# Altium PCB Overo Carrier.PcbDoc (part 2 of 2)
Units mil, origin at the board's own origin, x right, y up, seen from the top; angles counter-clockwise.
Board outline 2283.46 x 1417.32 mil, 2 copper layers (Top Layer, Bottom Layer), stack 22.091 mil thick; 56 components, 60 nets, 366 pads, 111 vias.
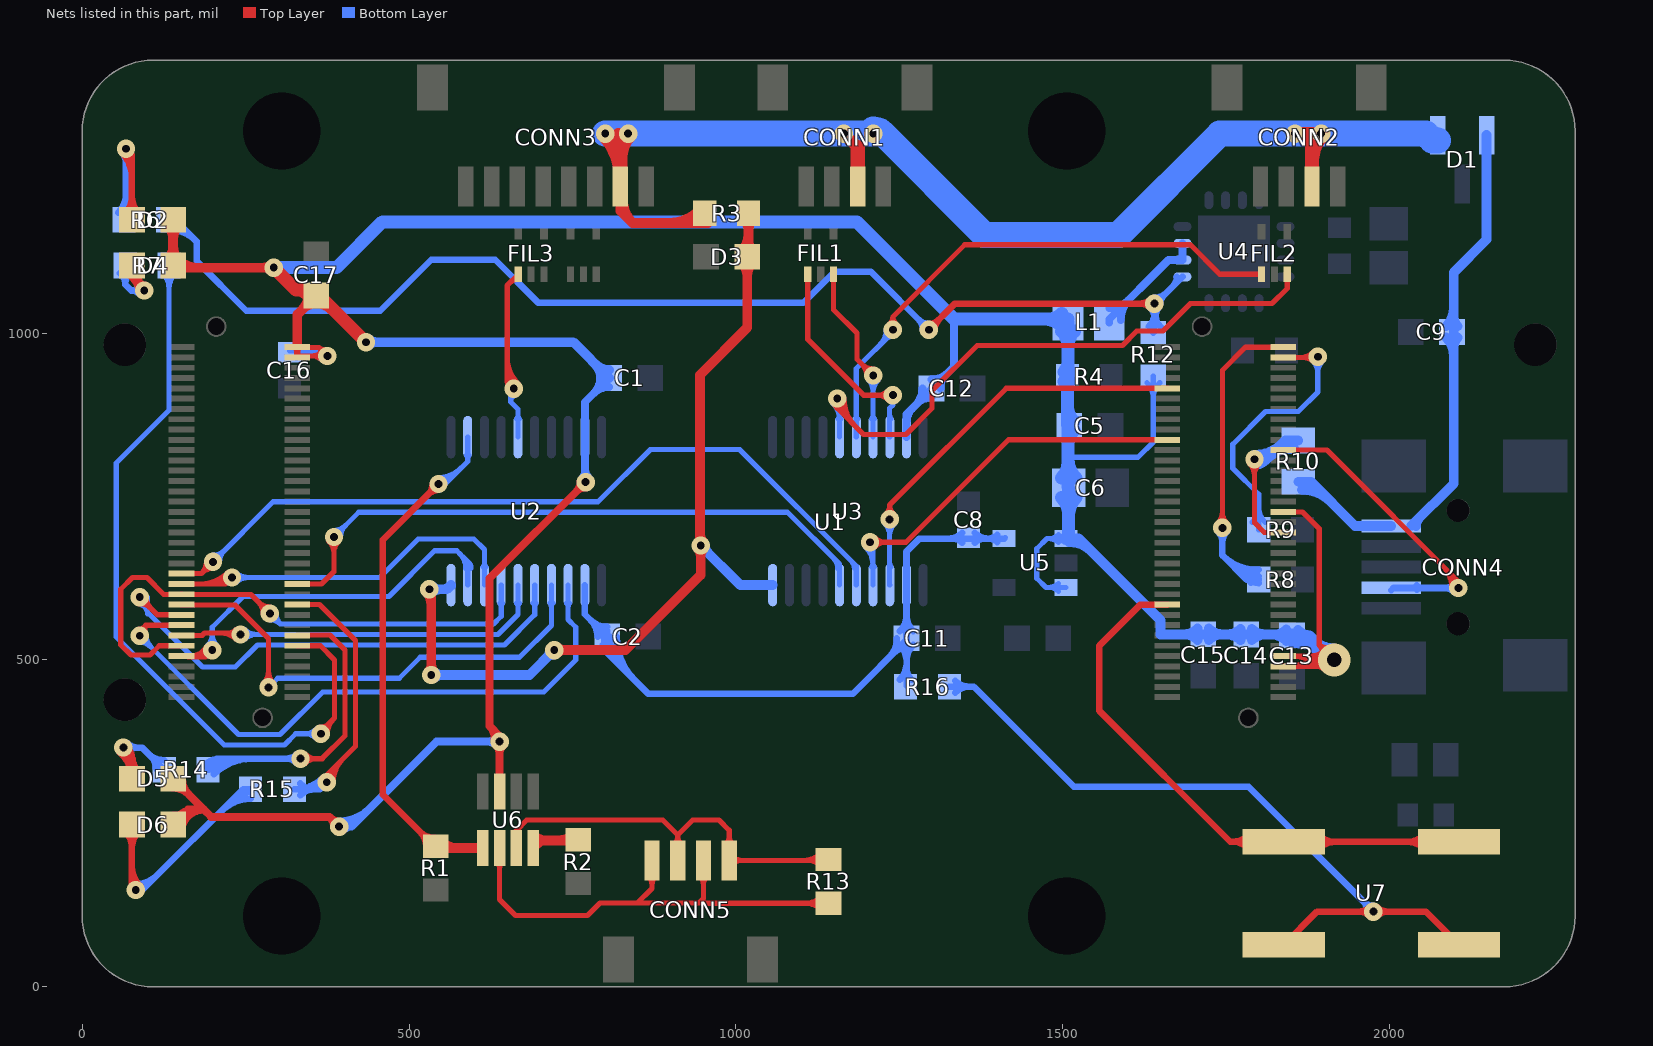
[diagram p2: the nets of this part, all layers, seen from the top]

## Via types
v1: diameter 28, hole 12, Top Layer to Bottom Layer, tented both sides, 109 vias
v2: diameter 28, hole 12, Top Layer to Bottom Layer, tented top, 1 vias
v3: diameter 50, hole 22, Top Layer to Bottom Layer, tented both sides, 1 vias

## Nets (pads, with @x,y where several pads share a name; then routed paths per layer and width w, separated by ;. In a path a pad name is that pad's centre, name@x,y a point inside that pad or via, vN(x,y) a via of type N, cw(c..) or ccw(c..) an arc to the next point about the centre after c; other vN are vias at no path point) (continued)
NetCONN4_4: CONN4.4 U1.J1-46 | length 575.7
  Top Layer w8: U1.J1-46@1836.92,820.93 1904.07,820.93 v1@2110,615 ; 2080.86,644.14 cw(c2046.72,610) v1@2095,610 ; 2094.51,630.49 cw(c2074.03,610) v1@2103,610
  Bottom Layer w10: CONN4.4@2002.26,606.5 2005.76,610 v1(2105,610) ; CONN4.4@2041.12,607.08 cw(c2048.17,600.03) 2048.17,610 ; CONN4.4@2041.12,613.93 ccw(c2050.6,623.41) 2050.6,610 ; v1@2098.64,603.64 ccw(c2083.27,588.27) 2083.27,610 ccw(c2083.27,631.73) v1@2098.64,616.36
NetCONN5_1: CONN5.1 CONN5.3 R13.1 U6.6 | length 872.6
  Top Layer w8: U6.6@635.04,189.96 cw(c626.74,181.66) 638.47,181.66 cw(c650.2,181.66) U6.6@641.91,189.96 ; U6.6@638.47,212.09 638.47,133.53 663,109 773,109 792,128 849,128 ; CONN5.1@866.02,169.15 cw(c852.69,155.81) 871.54,155.81 cw(c890.4,155.81) CONN5.1@877.07,169.15 ; CONN5.1@871.54,193.37 871.54,150.54 849,128 ; CONN5.3@944.76,169.15 cw(c931.43,155.81) 950.28,155.81 cw(c969.14,155.81) CONN5.3@955.81,169.15 ; CONN5.3@950.28,193.37 950.28,135.28 943,128 ; R13.1@1129.93,118.1 ccw(c1106.52,94.69) 1106.52,127.8 ccw(c1106.52,160.92) R13.1@1129.93,137.5 ; R13.1@1141.6,127.8 957.76,127.8 957.57,128 943,128 ; 849,128 943,128
NetCONN5_2: CONN5.2 CONN5.4 R13.2 U6.7 | length 762.7
  Top Layer w8: U6.7@664.06,212.09 664.06,239.06 680,255 888,255 910.91,232.09 ; CONN5.2@905.39,217.59 ccw(c892.06,230.93) 910.91,230.93 ccw(c929.77,230.93) CONN5.2@916.44,217.59 ; CONN5.2@910.91,193.37 910.91,232.09 ; CONN5.4@984.13,217.59 ccw(c970.8,230.93) 989.65,230.93 ccw(c1008.51,230.93) CONN5.4@995.18,217.59 ; CONN5.4@995.18,187.85 cw(c1008.51,174.51) 1008.51,193.37 cw(c1008.51,212.23) CONN5.4@995.18,198.89 ; 1103.23,193.37 ccw(c1103.23,231.14) R13.2@1129.93,204.43 ; 1109.8,193.37 cw(c1109.8,164.91) R13.2@1129.93,185.03 ; R13.2@1141.6,194.73 1140.24,193.37 CONN5.4@989.65,193.37 989.65,239.35 974,255 933.83,255 910.91,232.09
NetD2_1: D2.1 R6.2 | length 410.8
  Top Layer w10: v1@60.64,1275.64 cw(c23.29,1238.29) 76.1,1238.29 ; D2.1@65.72,1183.65 ccw(c40.65,1208.72) 76.1,1208.72 ccw(c111.56,1208.72) D2.1@86.49,1183.65 ; v1(67,1282) 76.1,1272.9 D2.1@76.1,1187 ; v1@67.71,1282.71 cw(c47.44,1262.44) 76.1,1262.44
  Bottom Layer w10: R6.2@54.95,1184.23 ccw(c25.84,1213.33) 67,1213.33 ; v1@60.64,1275.64 cw(c45.27,1260.27) 67,1260.27 cw(c88.73,1260.27) v1@73.36,1275.64 ; R6.2@63.94,1173.27 67,1176.33 v1(67,1282) ; 67,1198.54 ccw(c87.24,1198.54) R6.2@72.93,1184.23
NetD4_1: D4.1 R7.2 | length 319.4
  Top Layer w10: D4.1@66.42,1093.58 v1(95,1065) cw(c115,1085) D4.1@89.4,1097.03 ; D4.1@77.88,1087.29 ccw(c102.08,1101.26) v1@96.72,1073.83 ; D4.1@80.34,1101.28 ccw(c101.3,1091.44) 84.93,1075.07 ; 83.87,1076.91 ccw(c90.18,1080.56) v1@92.33,1073.6 ; v1@86,1065 ccw(c64.27,1065) 79.64,1080.36 ccw(c95,1095.73) v1@95,1074 ; v1@87.46,1069.92 ccw(c81.26,1073.97) 87.68,1077.68 ccw(c94.1,1081.39) v1@94.5,1073.99
  Bottom Layer w10: R7.2@57.77,1091.55 cw(c43.13,1074.06) 65.94,1074.06 ; R7.2@65.94,1103.27 65.94,1074.06 ; R7.2@74.1,1091.55 ccw(c88.74,1074.06) 65.94,1074.06 ; v1@88.26,1059.03 ccw(c75,1047.28) 75,1065 ; v1@88.26,1070.97 cw(c75,1082.72) 75,1065 ; v1(95,1065) 75,1065 ; 65.94,1074.06 75,1065
NetD5_1: D5.1 R14.1 | length 443.4
  Top Layer w10: v1@56.98,359.31 cw(c18.31,316.36) D5.1@76.1,316.36 ; v1@60.56,357.34 cw(c52.89,330.06) D5.1@80.26,337.39 ; v1(63,366) 76.1,352.9 ; v1@63.27,366.96 cw(c58.42,349.74) 75.71,354.37 ; v1@63.5,366.87 cw(c48.89,341.56) 77.11,349.12 ; v1@63.67,366.74 cw(c38.53,338.82) 76.1,338.82 ; v1@64.07,357.06 cw(c65.8,342.59) 76.1,352.9 ; D5.1@65.86,328.64 ccw(c42.27,352.89) 76.1,352.89 ; v1@71.94,364.93 ccw(c86.41,363.2) 76.1,352.9 ; D5.1@76.1,318.12 76.1,352.9 ; D5.1@86.34,328.64 cw(c109.94,352.89) 76.1,352.89
  Bottom Layer w10: v1(63,366) 91.54,366 R14.1@125.54,332 ; v1@69.36,359.64 cw(c84.73,344.27) 84.73,366 cw(c84.73,387.73) v1@69.36,372.36 ; 100.47,357.07 ccw(c125.54,382.14) R14.1@125.54,346.68 ; 105.22,352.32 cw(c86.87,333.97) R14.1@112.82,333.97
NetD6_1: D6.1 R15.1 | length 564
  Top Layer w10: D6.1@65.72,237.73 cw(c40.65,212.67) 76.1,212.67 cw(c111.56,212.67) D6.1@86.49,237.73 ; 76.1,183.96 ccw(c117.96,183.96) v1@88.36,154.36 ; D6.1@76.1,248.12 76.1,153.9 v1(82,148)
  Bottom Layer w10: v1@82,147 ccw(c82,168.73) 97.36,153.36 ; v1(82,148) 92,148 246,302 R15.1@257.54,302 ; v1@82,157 ccw(c82,202.87) 114.44,170.44 ; 212.77,268.77 cw(c257.54,224.01) R15.1@257.54,287.32 ; 229.85,285.85 cw(c257.54,258.16) R15.1@257.54,297.32
NetFIL1_1: FIL1.1 U3.18 | length 390.2
  Top Layer w8: FIL1.1@1109.91,1089.79 1109.91,990.09 1195,905 v1(1240,905) ; v1@1232.93,897.93 ccw(c1215.86,880.86) 1215.86,905 ccw(c1215.86,929.14) v1@1232.93,912.07
  Bottom Layer w8: 1235,873.94 ccw(c1242.81,873.94) U3.18@1237.29,868.42 ; U3.18@1235.24,840.79 1235,841.03 1235,885 1240,890 ; v1@1236.15,895.77 cw(c1233.75,890) 1240,890 ; v1(1240,905) 1240,890 ; v1@1243.85,895.77 ccw(c1246.25,890) 1240,890
NetFIL1_3: FIL1.3 U3.17 | length 361.1
  Top Layer w8: FIL1.3@1149.28,1089.79 1149.28,1035.72 1185,1000 1185,960 v1(1210,935) ; v1@1200,935 ccw(c1175.86,935) 1192.93,952.07 ccw(c1210,969.14) v1@1210,945
  Bottom Layer w8: v1@1202.93,927.93 cw(c1186.7,911.7) 1209.65,911.7 ; U3.17@1207.61,868.42 ccw(c1202.68,873.36) 1209.65,873.36 ccw(c1216.63,873.36) U3.17@1211.7,868.42 ; U3.17@1209.65,840.79 1209.65,934.65 v1(1210,935) ; 1209.65,910.02 cw(c1234.98,910.02) v1@1217.07,927.93
NetFIL2_1: FIL2.1 U3.16 | length 907
  Top Layer w8: v1@1234,1013 ccw(c1225,1025) 1240,1025 ; v1(1240,1005) 1240,1025 ; v1@1246,1013 cw(c1255,1025) 1240,1025 ; FIL2.1@1803.91,1089.79 1740.21,1089.79 1695,1135 1350,1135 1240,1025
  Bottom Layer w8: 1184,873.51 ccw(c1191.19,873.51) U3.16@1186.11,868.42 ; U3.16@1184.06,840.79 1184,840.85 1184,945.83 1240,1001.83 v1(1240,1005) ; 1220.69,982.52 ccw(c1198.21,1005) v1@1230,1005 ; 1228.34,990.17 cw(c1240,978.51) v1@1240,995
NetFIL2_3: FIL2.3 U3.15 | length 1070.6
  Top Layer w8: v1@1149,900 ccw(c1170.73,900) 1155.36,884.64 ; v1@1151.15,890.77 cw(c1148.75,885) 1155,885 ; v1(1155,900) 1155,885 ; v1@1157,900 ccw(c1198.04,900) 1169.02,870.98 ; v1@1158.85,890.77 ccw(c1161.25,885) 1155,885 ; v1@1165,900 ccw(c1225.36,900) 1182.68,857.32 ; FIL2.3@1843.28,1089.79 1843.28,1068.28 1820,1045 1695,1045 1653,1003 1613,1003 1591,981 1369,981 1300,912 1300,885 1260,845 1195,845 1155,885
  Bottom Layer w8: v1@1147.93,892.93 cw(c1122.48,867.48) U3.15@1158.47,867.48 ; v1(1155,900) 1158.47,896.53 U3.15@1158.47,840.79 ; U3.15@1156.43,868.42 ccw(c1151.5,873.36) 1158.47,873.36 ccw(c1165.45,873.36) U3.15@1160.52,868.42 ; 1158.47,884.24 cw(c1170.76,884.24) v1@1162.07,892.93
NetL1_1: L1.1 U4.14 U4.15 | length 246.7
  Bottom Layer w12: L1.1@1570.9,1016.27 1570.9,1020.9 1661.61,1111.61 U4.14@1682.99,1111.61 U4.15@1682.99,1137.2 ; L1.1@1570.9,1037.83 ccw(c1570.9,1078.7) 1599.8,1049.8 ; L1.1@1588.52,1020.2 cw(c1632.74,1020.2) 1601.47,1051.47
NetR1_2: R1.2 U2.12 U6.5 | length 988.7
  Top Layer w10: R1.2@526.05,215.06 ccw(c495.35,215.06) 517.06,236.77 ccw(c538.76,258.48) R1.2@538.76,227.78 ; v1@536,769 cw(c514.27,769) 529.64,753.64 cw(c545,738.27) v1@545,760 ; R1.2@540.73,213.09 460,293.83 460,684 v1(545,769)
  Top Layer w15: R1.2@540.73,213.09 541.73,212.09 U6.5@612.88,212.09 ; R1.2@549.93,207.84 cw(c560.2,197.56) R1.2@560.2,212.09 ; R1.2@549.93,222.29 ccw(c574.53,246.89) 574.53,212.09
  Bottom Layer w8: v1@545,771 ccw(c545,799.97) 565.49,779.49 ; v1@545,779 ccw(c545,827.28) 579.14,793.14 ; v1@546,760 589.7,803.7 U2.12@589.7,840.79 ; U2.12@587.66,813.16 cw(c582.72,808.22) 589.7,808.22 cw(c596.68,808.22) U2.12@591.74,813.16
NetR2_2: R2.2 U6.8 | length 136.3
  Top Layer w15: U6.8@689.65,212.09 701.56,224 ; U6.8@690.61,231.76 ccw(c709.34,250.48) 709.34,224 ; U6.8@690.92,231.29 ccw(c701.56,235.41) 701.56,224 ; 729.53,224 ccw(c729.53,252.29) R2.2@749.54,232.29 ; 734.66,224 cw(c734.66,202.96) R2.2@749.54,217.84 ; R2.2@747.83,224 701.56,224
NetR6_1: R6.1 R12.2 U4.13 | length 2147
  Top Layer w10: v1(1295,1005) 1335,1045 v1(1640,1045) ; v1@1295,1014 ccw(c1295,1035.73) 1310.36,1020.36 ccw(c1325.73,1005) v1@1304,1005 ; v1@1633.64,1038.64 ccw(c1618.27,1023.27) 1618.27,1045 ccw(c1618.27,1066.73) v1@1633.64,1051.36
  Bottom Layer w8: v1(1640,1045) v1@1641.98,1045
  Bottom Layer w10: R6.1@130.87,1158.58 cw(c130.87,1096.9) 174.49,1140.51 ; R6.1@130.87,1168.58 cw(c130.87,1131.04) 157.41,1157.59 ; R6.1@145,1170 175,1140 175,1110 251,1034 455.82,1034 533.82,1112 631.87,1112 697.87,1046 1103,1046 1151,1094 1206,1094 v1(1295,1005) ; v1@1286,1005 ccw(c1264.27,1005) 1279.64,1020.36 ccw(c1295,1035.73) v1@1295,1014 ; R12.2@1631.38,1009.72 ccw(c1610.56,1030.54) 1640,1030.54 ; v1@1633.64,1038.64 cw(c1618.27,1023.27) 1640,1023.27 cw(c1661.73,1023.27) v1@1646.36,1038.64 ; v1@1635.5,1037.21 cw(c1630.24,1028.09) 1640.41,1030.81 ; R12.2@1638.4,1000.73 1640,1002.33 v1(1640,1045) ; v1@1640,1032.33 ccw(c1671.96,1032.33) R12.2@1649.36,1009.72 ; v1@1640,1054 ccw(c1640,1080.5) 1658.74,1061.76 ; v1@1641.98,1045 U4.13@1682.99,1086.02 ; 1642.81,1021.83 cw(c1661.05,1026.72) v1@1646.79,1039.1 ; v1@1649,1045 cw(c1665.96,1045) 1653.97,1056.99 ; 1668,1071.03 ccw(c1653.02,1086.02) U4.13@1674.21,1086.02
NetR7_1: R7.1 U1.J4-30 | length 1305.9
  Top Layer w8: U1.J4-30@329.05,521.72 364.28,521.72 386,500 386,411 365,390 v1(365,387) ; v1@365,397 ccw(c365,413.9) 376.95,401.95 ; v1@375,387 cw(c406.38,387) 384.19,409.19
  Bottom Layer w8: R7.1@123.17,1091.6 cw(c99.75,1068.18) 132.87,1068.18 cw(c165.98,1068.18) R7.1@142.57,1091.6 ; R7.1@132.87,1103.27 132.87,881.87 52,801 52,535 217.27,369.73 309.36,369.73 326.63,387 v1(365,387) ; v1@357.93,379.93 ccw(c340.86,362.86) 340.86,387 ccw(c340.86,411.14) v1@357.93,394.07
NetR8_2: R8.2 U1.J1-36 | length 679.8
  Top Layer w8: v1@1736.93,709.07 ccw(c1719.86,726.14) 1744,726.14 ccw(c1768.14,726.14) v1@1751.07,709.07 ; v1(1744,702) 1744,943 1779.41,978.41 U1.J1-36@1836.92,978.41
  Bottom Layer w10: v1@1737.64,695.64 cw(c1722.27,680.27) 1744,680.27 cw(c1765.73,680.27) v1@1750.36,695.64 ; v1(1744,702) 1744,660 ; 1760.64,643.36 ccw(c1798.5,681.22) R8.2@1799.49,627.68 ; 1777.28,626.72 ccw(c1799.1,648.55) R8.2@1799.67,617.69 ; R8.2@1787.67,618.42 ccw(c1781,615.85) 1781,623 ; R8.2@1787.67,627.58 cw(c1781,630.15) 1781,623 ; R8.2@1799.3,637.68 cw(c1797.91,713.9) 1744,660 ; R8.2@1799.54,623 1781,623 ; 1744,660 1781,623
NetR9_2: R9.2 U1.J1-37 | length 545.8
  Top Layer w8: U1.J1-37@1836.92,962.41 1888.66,962.41 v1(1890,963.75) ; 1862.63,962.41 ccw(c1862.63,991.12) v1@1882.93,970.82 ; 1869.09,962.41 cw(c1869.09,942.84) v1@1882.93,956.68
  Bottom Layer w8: R9.2@1789.84,710.67 ccw(c1766.42,734.08) 1799.54,734.08 ccw(c1832.65,734.08) R9.2@1809.23,710.67 ; R9.2@1799.54,699 1799.54,753.46 1760,793 1760,830 1810,880 1860,880 1890,910 v1(1890,963.75) ; v1@1882.93,956.68 cw(c1865.86,939.61) 1890,939.61 cw(c1914.14,939.61) v1@1897.07,956.68
NetR10_2: R10.2 U1.J1-54 | length 401.8
  Top Layer w8: v1@1785.93,799.93 cw(c1768.86,782.86) 1793,782.86 cw(c1817.14,782.86) v1@1800.07,799.93 ; v1(1793,807) 1793,710 1808.06,694.94 U1.J1-54@1836.92,694.94
  Bottom Layer w15: v1@1793,798.5 ccw(c1793,823.03) 1810.35,805.69 ; v1(1793,807) 1811.66,807 ; v1@1793,813.5 ccw(c1793,874.25) R10.2@1835.95,831.29 ; v1@1797.6,802.4 cw(c1808.69,791.31) 1808.69,807 cw(c1808.69,822.69) v1@1797.6,811.6 ; R10.2@1853.57,823.32 ccw(c1851.19,767.48) 1811.66,807 ; R10.2@1860,835.5 1840.16,835.5 1811.66,807
NetR14_2: R14.2 U1.J4-29 | length 653
  Top Layer w8: U1.J4-29@329.05,538 379,538 402,515 402,384 367,349 v1(334,349) ; v1@341.07,341.93 cw(c358.14,324.86) 358.14,349 cw(c358.14,373.14) v1@341.07,356.07
  Bottom Layer w10: R14.2@187.31,339.12 cw(c211.17,315.26) 211.17,349 ; R14.2@192.46,332 209.46,349 v1(334,349) ; R14.2@194.39,332.05 cw(c235.31,291.12) 235.31,349 ; R14.2@201.46,324.98 cw(c259.45,266.98) 259.45,349 ; v1@327.64,342.64 ccw(c312.27,327.27) 312.27,349 ccw(c312.27,370.73) v1@327.64,355.36
NetR15_2: R15.2 U1.J4-26 | length 587.6
  Top Layer w8: U1.J4-26@329.05,584.71 362.92,584.71 418,529.63 418,368 374,324 v1(374,313) ; v1@376,313 cw(c407.38,313) 385.19,335.19 ; v1@384,313 cw(c434.7,313) 398.85,348.85
  Bottom Layer w10: R15.2@324.46,302 363,302 v1(374,313) ; R15.2@325.72,302 ccw(c325.72,361.28) v1@367.64,319.36 ; R15.2@333.46,293.01 cw(c355.16,271.3) 355.16,302 cw(c355.16,332.7) R15.2@333.46,310.99 ; 349.86,302 ccw(c349.86,337.14) v1@374.71,312.29
NetR16_2: R16.2 U7.A | length 1251.4
  Top Layer w10: U7.A@1838.14,64.26 1888.88,115 v1(1975,115) 2055.12,115 U7.A@2105.86,64.26 ; v1@1968.64,108.64 ccw(c1953.27,93.27) 1953.27,115 ccw(c1953.27,136.73) v1@1968.64,121.36 ; v1@1981.36,108.64 cw(c1996.73,93.27) 1996.73,115 cw(c1996.73,136.73) v1@1981.36,121.36
  Bottom Layer w10: R16.2@1326.46,459 1364,459 1517,306 1784,306 v1(1975,115) ; R16.2@1335.46,450.01 cw(c1357.16,428.3) 1357.16,459 cw(c1357.16,489.7) R16.2@1335.46,467.99 ; v1@1966,115 ccw(c1944.27,115) 1959.64,130.36 ccw(c1975,145.73) v1@1975,124
NetU1_J1-10: U1.J1-10 U7.B | length 1012.3
  Top Layer w10: U1.J1-10@1659.76,584.71 1618.71,584.71 1556,522 1556,422 1756,222 1804,222 U7.B@1816,234 ; 1758.75,222 cw(c1758.75,185.66) U7.B@1784.45,211.36 ; 1760.01,222 ccw(c1760.01,256.57) U7.B@1784.45,232.12 ; U7.B@1838.14,221.74 U7.B@2105.86,221.74 ; U7.B@1891.83,211.36 cw(c1916.9,186.29) 1916.9,221.74 cw(c1916.9,257.19) U7.B@1891.83,232.12 ; U7.B@2052.17,211.36 ccw(c2027.1,186.29) 2027.1,221.74 ccw(c2027.1,257.19) U7.B@2052.17,232.12
NetU1_J1-26: U1.J1-26 U3.4 | length 683.8
  Top Layer w8: v1(1205,680) 1260,680 1416.68,836.68 U1.J1-26@1659.76,836.68 ; v1@1212.07,672.93 cw(c1229.14,655.86) 1229.14,680 cw(c1229.14,704.14) v1@1212.07,687.07
  Bottom Layer w8: v1@1197.93,672.93 cw(c1169.62,644.62) U3.4@1209.65,644.62 ; v1@1203.59,678.59 cw(c1188.94,663.94) 1209.65,663.94 ; v1(1205,680) 1209.65,675.35 U3.4@1209.65,614.41 ; U3.4@1207.61,642.04 ccw(c1202.68,646.98) 1209.65,646.98 ccw(c1216.63,646.98) U3.4@1211.7,642.04
NetU1_J1-31: U1.J1-31 U3.3 | length 698.2
  Top Layer w8: v1@1228.42,722.53 ccw(c1215.8,737) 1235,737 ; v1(1235,715) 1235,737 ; v1@1241.58,722.53 cw(c1254.2,737) 1235,737 ; U1.J1-31@1659.76,915.42 1413.42,915.42 1235,737
  Bottom Layer w8: v1@1227.93,707.93 cw(c1210.86,690.86) 1235,690.86 cw(c1259.14,690.86) v1@1242.07,707.93 ; 1235,647.57 ccw(c1242.81,647.57) U3.3@1237.29,642.04 ; v1(1235,715) 1235,614.65 U3.3@1235.24,614.41
NetU1_J4-24: U1.J4-24 U3.6 | length 1064.7
  Top Layer w8: U1.J4-24@329.05,616.2 366.2,616.2 385,635 v1(385,688) ; v1@377.93,680.93 cw(c360.86,663.86) 385,663.86 cw(c409.14,663.86) v1@392.07,680.93
  Bottom Layer w8: v1(385,688) 423,726 1079,726 1158.47,646.53 U3.6@1158.47,614.41 ; v1@385,698 ccw(c385,722.14) 402.07,705.07 ccw(c419.14,688) v1@395,688 ; 1148.92,656.08 cw(c1132.85,640) U3.6@1155.58,640
NetU1_J4-40: U1.J4-40 U2.9 | length 713.8
  Top Layer w8: 176.62,504.75 ccw(c176.62,529.32) v1@197.32,516.08 ; v1@189.88,510.9 cw(c184.85,508.64) 188.75,504.75 ; v1@190.58,520.39 cw(c162,538.67) 162,504.75 188.75,504.75 ; v1@194.9,505.88 ccw(c192.64,500.85) 188.75,504.75 ; v1(199,515) 188.75,504.75
  Bottom Layer w8: v1@191.93,522.07 ccw(c174.86,539.14) 199,539.14 ccw(c223.14,539.14) v1@206.07,522.07 ; v1(199,515) 199,550 246.05,597.05 469.05,597.05 539,667 573,667 589.7,650.3 U2.9@589.7,614.41 ; 577.49,662.51 cw(c554.97,640) U2.9@586.81,640 ; U2.9@587.66,642.04 ccw(c582.72,646.98) 589.7,646.98 ccw(c596.68,646.98) U2.9@591.74,642.04 ; 591.14,648.86 cw(c582.29,640) U2.9@594.81,640
NetU1_J4-41: U1.J4-41 U1.J4-46 U2.7 | length 945.1
  Top Layer w8: U1.J4-41@151.88,521.72 117.72,521.72 103.5,507.5 74.5,507.5 59,523 59,608 77,626 99,626 124.8,600.2 U1.J4-46@151.88,600.2 ; U1.J4-46@151.88,600.46 151.88,599.95 258.1,599.95 v1(287,571.05) ; v1@277,571.05 ccw(c252.86,571.05) 269.93,588.12 ccw(c287,605.19) v1@287,581.05
  Bottom Layer w8: v1(287,571.05) 303.05,555 ; v1@287.45,561.06 cw(c288.37,540.33) 303.05,555 ; v1@296.99,570.6 ccw(c317.72,569.67) 303.05,555 ; U2.7@638.84,586.78 cw(c633.91,581.84) 640.88,581.84 cw(c647.86,581.84) U2.7@642.92,586.78 ; U2.7@640.88,614.41 640.88,566.88 629,555 303.05,555
NetU1_J4-47: U1.J4-47 U2.8 | length 668.1
  Top Layer w8: U1.J4-47@168,616.2 219.2,616.2 v1(229,626) v1@224,621 ; 181.21,616.2 ccw(c181.21,673.79) v1@221.93,633.07 ; 200.52,616.2 ccw(c200.52,654.48) v1@227.59,627.41
  Bottom Layer w8: v1(229,626) 455,626 514,685 599,685 615.29,668.71 U2.8@615.29,614.41 ; v1@236.07,618.93 cw(c253.14,601.86) 253.14,626 cw(c253.14,650.14) v1@236.07,633.07 ; U2.8@613.25,642.04 ccw(c608.31,646.98) 615.29,646.98 ccw(c622.27,646.98) U2.8@617.33,642.04
NetU1_J4-48: U1.J4-48 U3.5 | length 1283.2
  Top Layer w8: U1.J4-48@170.6,632.27 182.27,632.27 v1(200,650) ; v1@190,650 cw(c165.86,650) 182.93,632.93 cw(c200,615.86) v1@200,640
  Bottom Layer w8: v1(200,650) 292,742 789,742 869,822 1005.63,822 1184.06,643.56 U3.5@1184.06,614.41 ; v1@200,660 ccw(c200,684.14) 217.07,667.07 ccw(c234.14,650) v1@210,650 ; 1176.61,651.02 cw(c1165.59,640) U3.5@1181.17,640
NSS: FIL3.1 U2.15 | length 396.1
  Top Layer w8: 650,943.97 ccw(c688.97,943.97) v1@661.41,916.41 ; 650,963.28 ccw(c708.28,963.28) v1@667.07,922.07 ; v1@650.98,919.31 ccw(c646.47,921.46) 650,925 ; 653.58,1076.45 cw(c666.91,1063.12) FIL3.1@666.91,1081.98 ; v1@655.69,924.02 cw(c653.54,928.53) 650,925 ; v1(660,915) 650,925 ; FIL3.1@666.91,1089.79 650,1072.87 650,925
  Bottom Layer w8: 655,894.39 cw(c666.67,894.39) v1@663.08,905.48 ; v1(660,915) 655,910 655,895 666.47,883.53 U2.15@666.47,840.79 ; U2.15@664.43,868.42 ccw(c659.5,873.36) 666.47,873.36 ccw(c673.45,873.36) U2.15@668.52,868.42
OE: D3.1 R3.2 U2.10 U3.10 | length 1716.5
  Top Layer w15: v1@526.4,603.4 cw(c508.07,585.07) 534,585.07 ; v1@529.4,481.6 ccw(c518.31,492.69) 534,492.69 ccw(c549.69,492.69) v1@538.6,481.6 ; v1(531,608) 534,605 v1(534,477) ; v1(722,515) 831,515 946,630 v1(946,675) 945,676 945,936 1017.09,1008.09 D3.1@1017.09,1116.73 ; v1@726.6,510.4 cw(c737.69,499.31) 737.69,515 cw(c737.69,530.69) v1@726.6,519.6 ; v1@941.4,670.4 cw(c930.31,659.31) 946,659.31 cw(c961.69,659.31) v1@950.6,670.4 ; 945,693.11 ccw(c964.11,693.11) v1@950.6,679.6 ; D3.1@1008.48,1108.12 cw(c987.68,1087.32) 1017.09,1087.32 cw(c1046.51,1087.32) D3.1@1025.71,1108.12 ; D3.1@1008.48,1125.35 ccw(c982.92,1150.9) 1019.06,1150.9 ; R3.2@1011.84,1174.07 cw(c994.4,1156.63) 1019.06,1156.63 cw(c1043.73,1156.63) R3.2@1026.29,1174.07 ; D3.1@1019.06,1116.73 R3.2@1019.06,1182.47 ; 1019.06,1141.4 ccw(c1041.76,1141.4) D3.1@1025.71,1125.35
  Bottom Layer w15: v1(531,608) 557.7,608 U2.10@564.11,614.41 ; v1(534,477) 684,477 v1(722,515) ; v1@535.6,603.4 cw(c546.69,592.31) 546.69,608 cw(c546.69,623.69) v1@535.6,612.6 ; v1@538.6,472.4 cw(c549.69,461.31) 549.69,477 cw(c549.69,492.69) v1@538.6,481.6 ; 550.11,608 ccw(c550.11,628.42) U2.10@564.54,613.98 ; v1@715.5,515 cw(c699.81,515) 710.9,503.9 cw(c722,492.81) v1@722,508.5 ; v1@946,668.5 cw(c946,652.81) 957.1,663.9 cw(c968.19,675) v1@952.5,675 ; v1(946,675) 1006.59,614.41 U3.10@1056.11,614.41
SPI_CLK_OVERO: U1.J4-43 U2.3 | length 1042
  Top Layer w8: v1@87.43,546.98 ccw(c86.75,558.79) 97.04,552.96 ; v1(88,537) 97.04,552.96 ; v1@96.86,541.64 cw(c107.33,547.13) 97.04,552.96 ; U1.J4-43@151.88,553.21 151.63,552.96 97.04,552.96
  Bottom Layer w8: v1@88,527 cw(c88,502.86) 105.07,519.93 cw(c122.14,537) v1@98,537 ; v1(88,537) 239.27,385.73 302.73,385.73 368,451 706,451 755,500 755,550 743.24,561.76 U2.3@743.24,614.41 ; U2.3@741.2,586.78 cw(c736.27,581.84) 743.24,581.84 cw(c750.22,581.84) U2.3@745.29,586.78
SPI_MISO_OVERO: U1.J4-45 U2.4 | length 811.6
  Top Layer w8: U1.J4-45@151.88,583.95 233.91,583.95 285,532.87 v1(285,458) ; v1@277.93,465.07 ccw(c260.86,482.14) 285,482.14 ccw(c309.14,482.14) v1@292.07,465.07
  Bottom Layer w8: v1(285,458) 299,472 485,472 517,504 669,504 717.65,552.65 U2.4@717.65,614.41 ; U2.4@715.61,586.78 cw(c710.68,581.84) 717.65,581.84 cw(c724.63,581.84) U2.4@719.7,586.78
SPI_MOSI_OVERO: U1.J4-44 U2.5 | length 884.1
  Top Layer w8: v1@88,586 cw(c88,561.86) 105.07,578.93 cw(c122.14,596) v1@98,596 ; v1(88,596) 115.04,568.96 U1.J4-44@140,568.96
  Bottom Layer w8: v1@86.37,586.13 cw(c83.71,570.06) 100,570.06 ; v1@87.67,594.03 cw(c85.27,579.49) 100,579.49 ; v1@100,596 100,573 184,489 234,489 268,523 646,523 692.06,569.06 U2.5@692.06,614.41 ; U2.5@690.02,586.78 cw(c685.09,581.84) 692.06,581.84 cw(c699.04,581.84) U2.5@694.11,586.78
SPI_NSS: U1.J4-42 U2.6 | length 646.1
  Top Layer w8: U1.J4-42@167,537.46 183.46,537.46 187,541 240,541 v1(242,539) ; 213.03,541 cw(c213.03,510.03) v1@234.93,531.93 ; 222.69,541 ccw(c222.69,558.31) v1@234.93,546.07
  Bottom Layer w8: v1(242,539) 636,539 666.47,569.47 U2.6@666.47,614.41 ; v1@249.07,531.93 cw(c266.14,514.86) 266.14,539 cw(c266.14,563.14) v1@249.07,546.07 ; U2.6@664.43,586.78 cw(c659.5,581.84) 666.47,581.84 cw(c673.45,581.84) U2.6@668.52,586.78
V1.8: C2.2 C8.2 C11.2 R16.1 U2.2 U3.2 U5.5 | length 1590.4
  Bottom Layer w8: C11.2@1260.83,533.27 1260.83,530.34 1260.91,530.27 C11.2@1260.91,533.27 ; U5.5@1410.16,685.67 U5.5@1411.73,687.24
  Bottom Layer w10: U2.2@768.83,614.41 768.83,569.8 C2.2@802.91,535.73 ; C2.2@788.22,535.73 ccw(c752.77,535.73) 777.84,560.8 ccw(c802.91,585.87) C2.2@802.91,550.42 ; C2.2@795.92,522.82 cw(c789.58,511.1) 802.91,511.1 ; C2.2@797.59,535.73 ccw(c844.24,535.73) 811.25,502.75 ; C2.2@802.91,544.73 C2.2@802.91,535.73 ; C2.2@807.59,535.73 ccw(c878.38,535.73) 828.33,485.67 ; C2.2@809.89,522.82 ccw(c816.23,511.1) 802.91,511.1 ; C2.2@817.59,535.73 ccw(c912.53,535.73) 845.4,468.6 ; 1233.82,503.32 ccw(c1203.87,533.27) C11.2@1246.22,533.27 ; 1240.71,510.22 cw(c1260.91,490.03) C11.2@1260.91,518.58 ; C11.2@1250.52,522.88 cw(c1225.45,497.81) 1260.91,497.81 cw(c1296.36,497.81) C11.2@1271.29,522.88 ; C11.2@1250.52,543.65 ccw(c1225.63,568.55) 1260.83,568.55 ; R16.1@1250.54,469.96 ccw(c1225.53,494.98) 1260.91,494.98 ; C11.2@1260.83,530.34 1178.5,448 866,448 802.91,511.09 ; 1260.83,568.89 ccw(c1296.53,568.89) C11.2@1271.29,543.65 ; R16.1@1260.91,460.37 C11.2@1260.91,530.27 ; 1260.91,488.36 ccw(c1286.93,488.36) R16.1@1268.53,469.96 ; C11.2@1260.91,533.27 1260.83,533.27 U3.2@1260.83,614.41 1260.83,665.83 1280.67,685.67 U5.5@1410.16,685.67 ; 1324.98,685.67 ccw(c1324.98,715.62) C8.2@1346.16,694.44 ; 1330.65,685.67 cw(c1330.65,663.73) C8.2@1346.16,679.24 ; C8.2@1365.3,679.24 cw(c1380.82,663.73) 1380.82,685.67 ; C8.2@1365.3,694.44 ccw(c1386.48,715.62) 1386.48,685.67 ; U5.5@1399.72,680.16 ccw(c1386.42,666.85) 1386.42,685.67 ccw(c1386.42,704.49) U5.5@1399.72,691.18 ; 802.91,511.09 C2.2@802.91,535.73
V3.3: C1.2 C5.2 C6.2 C12.2 C13.2 C14.2 C15.1 C16.2 C17.2 D2.2 D4.2 D5.2 D6.2 L1.2 R4.2 R12.1 U1.J1-52 U1.J1-66 U1.J1-67 U1.J4-1 U1.J4-2 U2.19 U3.19 U5.1 U5.3 U6.3 | length 8091.5
  Top Layer w8: U1.J4-2@329.05,965 v1(375,965) 362,978 ; U1.J4-1@329.05,978.41 329.46,978 362,978 ; v1@365.22,967.09 ccw(c353.59,969.59) 362,978 ; v1@367.93,957.93 ccw(c350.86,940.86) 350.86,965 ccw(c350.86,989.14) v1@367.93,972.07 ; v1@372.91,974.78 cw(c370.41,986.41) 362,978 ; U1.J1-67@1836.92,490.22 v3@1920,490.22 ; U1.J1-66@1836.92,505.97 v3@1909.03,505.97 ; U1.J1-52@1836.92,726.44 1866.56,726.44 1892,701 1892,523 ; U1.J1-67@1840.69,490.22 ccw(c1840.69,574.31) 1900.15,514.85 cw(c1878.71,536.29) 1878.71,505.97 ; U1.J1-66@1849.89,505.97 cw(c1849.89,434.89) 1900.15,485.15 ccw(c1887.91,472.91) 1887.91,490.22 ; 1860,490.22 ccw(c1860,555) v3@1905.81,509.19 ; 1869.21,505.97 cw(c1869.21,454.21) v3@1905.81,490.81 ; 1879.32,490.22 ccw(c1879.32,535.68) v3@1911.46,503.54 ; 1888.52,505.97 cw(c1888.52,473.52) v3@1911.46,496.46 ; v3@1895.36,507.42 ccw(c1881.61,512.61) 1892,523 ; v3@1907.58,519.64 cw(c1902.39,533.39) 1892,523 ; v3(1915,500) v3@1909.03,505.97 ; v3@1915,505.97 v3@1909.03,505.97 ; 1892,523 v3@1909.03,505.97
  Top Layer w10: U1.J4-2@329.05,965 U1.J4-1@329.05,978.41 ; C17.2@357.5,1057 C17.2@358,1057.5 ; v1(638.47,375) v1@638.47,383.47
  Top Layer w12: D6.2@139.1,248.12 161.98,271 ; D5.2@139.1,304.43 cw(c139.1,271.39) 162.46,294.76 cw(c185.82,318.12) D5.2@152.78,318.12 ; D5.2@139.1,318.12 186.21,271 ; D6.2@139.3,261.8 ccw(c139.76,293.21) 161.98,271 ; D6.2@140.73,247.7 cw(c170.75,240.01) 170.75,271 ; D6.2@152.35,244.72 cw(c186.21,236.05) 186.21,271 ; D6.2@152.78,248.32 cw(c184.19,248.79) 161.98,271 ; v1@385,245 ccw(c365.69,245) 379.34,258.66 ccw(c393,272.31) v1@393,253 ; v1(393,245) 378,260 197.21,260 186.21,271 ; v1@630.56,376.16 ccw(c604.08,380.02) 623,398.94 ; v1@632.82,369.34 cw(c619.16,355.69) 638.47,355.69 cw(c657.79,355.69) v1@644.13,369.34 ; U6.3@638.47,298.71 v1(638.47,375) ; v1@638.47,383.47 623,398.94 ; v1@762,772 cw(c742.69,772) 756.34,758.34 cw(c770,744.69) v1@770,764 ; v1(770,772) 623,625 623,398.94 ; 161.98,271 186.21,271
  Top Layer w15: D4.2@130.48,1111.88 ccw(c109.68,1132.68) 139.1,1132.68 ccw(c168.51,1132.68) 147.71,1111.88 ccw(c176.4,1140.57) 176.4,1100 ; D2.2@130.48,1164.65 cw(c109.68,1143.85) 139.1,1143.85 cw(c168.51,1143.85) D2.2@147.71,1164.65 ; D4.2@139.1,1103.27 D2.2@139.1,1163.91 ; D4.2@142.36,1100 v1(293,1100) ; D4.2@147.71,1094.65 cw(c160.63,1081.74) 160.63,1100 ; v1@288.4,1095.4 ccw(c277.31,1084.31) 277.31,1100 ccw(c277.31,1115.69) v1@288.4,1104.6 ; U1.J4-1@329.05,978.41 329.05,1028.55 357.5,1057 C17.2@363,1057 ; C17.2@345.82,1057.5 cw(c316.4,1057.5) 337.2,1036.7 cw(c358,1015.9) C17.2@358,1045.32
  Top Layer w20: D2.2@140.09,1164.91 D2.2@140.09,1173.27 ; v1(293,1100) 326.75,1066.25 ; C17.2@349.52,1052.82 ccw(c326.75,1040.23) 326.75,1066.25 ; C17.2@357.5,1057 348.25,1066.25 326.75,1066.25 ; C17.2@358,1047.82 cw(c358,1013.58) 382.21,1037.79 ; C17.2@363,1057 v1(434,986)
  Bottom Layer w8: C16.2@317,972.5 367.5,972.5 v1(375,965) ; C16.2@327.28,962.25 cw(c352.01,937.52) 352.01,972.5 ; C16.2@327.28,978.87 ccw(c342.65,994.24) 342.65,972.5 ; C16.2@332.76,972.5 cw(c332.76,922.76) v1@367.93,957.93 ; 352.07,972.5 cw(c352.07,942.07) v1@373.59,963.59 ; U5.3@1493.51,604.65 ccw(c1478.49,589.63) 1478.49,610.87 ccw(c1478.49,632.1) U5.3@1493.51,617.09 ; U5.1@1493.51,679.45 ccw(c1478.49,664.44) 1478.49,685.67 ccw(c1478.49,706.9) U5.1@1493.51,691.89 ; U5.3@1504.65,610.87 1474.13,610.87 1460,625 1460,670 1475.67,685.67 U5.1@1504.65,685.67 ; 1507.94,810 1615,810 1638.4,833.4 R12.1@1638.4,933.8 ; R12.1@1628.7,924.1 cw(c1605.29,900.69) 1638.4,900.69 cw(c1671.52,900.69) R12.1@1648.1,924.1
  Bottom Layer w10: v1@768.83,773.17 v1(770,772)
  Bottom Layer w12: v1@393,241 ccw(c393,277.21) 418.61,251.61 ; v1(393,245) 412,245 ; v1@393,253 ccw(c393,318.18) 439.09,272.09 ; v1@398.72,239.41 cw(c412,226.44) 412,245 ; v1@398.72,250.59 ccw(c412,263.56) 412,245 ; v1@632.82,369.34 ccw(c619.16,355.69) 619.16,375 ccw(c619.16,394.31) v1@632.82,380.66 ; v1(638.47,375) 542,375 412,245 ; v1@764.34,777.66 ccw(c753.5,788.5) 768.83,788.5 ; v1@768.83,773.17 U2.19@768.83,840.79 768.83,894.2 C1.2@805.91,931.27 ; 768.83,794.13 ccw(c792.13,794.13) v1@775.66,777.66 ; C1.2@792.22,931.27 cw(c759.18,931.27) 782.54,907.91 cw(c805.91,884.54) C1.2@805.91,917.58 ; U3.19@1260.83,840.79 1260.83,875.83 1333.73,948.73 1333.73,1021.27 ; U3.19@1261.72,866.38 cw(c1286.7,866.38) 1269.04,884.04 ; 1274.58,889.58 ccw(c1248.89,915.27) C12.2@1285.22,915.27 ; 1277.87,892.87 cw(c1298.91,871.83) C12.2@1298.91,901.58 ; C12.2@1298.91,928.95 ccw(c1298.91,965.28) 1324.59,939.59 ; C12.2@1312.59,915.27 cw(c1342.34,915.27) 1321.3,936.3
  Bottom Layer w15: v1(434,986) 751.17,986 C1.2@805.91,931.27 ; v1@438.6,981.4 cw(c449.69,970.31) 449.69,986 cw(c449.69,1001.69) v1@438.6,990.6 ; C1.2@793.72,931.27 ccw(c764.3,931.27) 785.1,952.07 ccw(c805.91,972.87) C1.2@805.91,943.45 ; U5.1@1504.65,685.67 1524.33,685.67 1649.27,560.73 1649.27,539.09 1841.07,539.09 C13.2@1850.4,529.76 ; U5.1@1509.57,680.37 cw(c1509.57,631.95) 1543.81,666.19 ; 1684.86,539.09 ccw(c1684.86,568.97) C15.1@1705.98,547.84 ; 1685.51,539.09 cw(c1685.51,510.14) C15.1@1705.98,530.61 ; C15.1@1723.21,530.61 cw(c1743.69,510.14) 1743.69,539.09 ; C15.1@1723.21,547.84 ccw(c1744.34,568.97) 1744.34,539.09 ; 1750.19,539.09 cw(c1750.19,508.55) C14.2@1771.79,530.15 ; 1751.78,539.09 ccw(c1751.78,567.38) C14.2@1771.79,547.38 ; C14.2@1789.02,530.15 cw(c1810.62,508.55) 1810.62,539.09 ; C14.2@1789.02,547.38 ccw(c1809.02,567.38) 1809.02,539.09 ; 1817.77,539.09 cw(c1817.77,505.13) C13.2@1841.79,529.15 ; 1824.2,539.09 ccw(c1824.2,563.97) C13.2@1841.79,546.38 ; C13.2@1850.32,540.58 cw(c1851.83,486.11) 1890.36,524.64 ; C13.2@1850.4,537.76 1877.24,537.76 ; C13.2@1850.74,525.58 cw(c1853.16,438.16) v3(1915,500) 1877.24,537.76 ; C13.2@1859.58,529.74 cw(c1877.24,514.31) 1877.24,537.76 ; C13.2@1859.58,545.78 ccw(c1877.24,561.22) 1877.24,537.76 ; v3@1897.5,500 ccw(c1855.25,500) 1885.13,529.87 ccw(c1915,559.75) v3@1915,517.5 ; v3@1898.1,495.47 ccw(c1857.28,484.54) 1878.41,521.13 ccw(c1899.54,557.71) v3@1910.47,516.9
  Bottom Layer w20: v1(293,1100) 389,1100 459,1170 1185,1170 1333.73,1021.27 L1.2@1507.91,1021.27 ; 1472.45,1021.27 cw(c1472.45,984.75) L1.2@1498.27,1010.57 ; 1477.59,1021.27 ccw(c1477.59,1050.52) L1.2@1498.27,1029.84 ; C6.2@1497.91,748.31 cw(c1471.3,721.69) 1508.94,721.69 cw(c1546.58,721.69) C6.2@1519.96,748.31 ; C6.2@1497.91,778.23 ccw(c1473.71,802.43) 1507.94,802.43 ; L1.2@1498.27,1002.7 cw(c1475.02,979.44) 1507.91,979.44 cw(c1540.79,979.44) L1.2@1517.54,1002.7 ; R4.2@1501.48,925.84 cw(c1488.31,912.67) 1506.94,912.67 cw(c1525.57,912.67) R4.2@1512.39,925.84 ; R4.2@1501.48,940.69 ccw(c1485.97,956.2) 1507.91,956.2 ; U5.1@1504.65,685.67 1508.94,689.96 C6.2@1508.94,763.27 ; 1506.94,888.82 ccw(c1540.45,888.82) C5.2@1516.75,865.12 ; L1.2@1507.91,1016.27 1507.91,934.24 R4.2@1506.94,933.27 1506.94,859.27 1507.94,858.27 1507.94,810 C6.2@1507.94,764.27 ; 1507.94,807.26 ccw(c1548.99,807.26) C6.2@1519.96,778.23 ; 1507.94,830.13 cw(c1538.04,830.13) C5.2@1516.75,851.42
VBUS: C9.2 CONN4.1 D1.2 R10.1 | length 969.7
  Bottom Layer w15: R10.1@1860,772.5 1879.5,772.5 1947.01,704.99 CONN4.1@2002.26,704.99 ; R10.1@1865.91,760.32 cw(c1865.91,698.09) 1909.91,742.09 ; CONN4.1@2033.5,705.5 2098,770 2098,1093 2148.13,1143.13 D1.2@2148.13,1302.8 ; CONN4.1@2040.04,704.99 cw(c2057.04,704.99) 2045.02,717.02 ; C9.2@2086.48,993.12 cw(c2058.66,965.3) 2098,965.3 ; C9.2@2086.48,1010.35 ccw(c2058.66,1038.16) 2098,1038.16 ; 2098,979.33 cw(c2117.5,979.33) C9.2@2103.71,993.12 ; 2098,1024.14 ccw(c2117.5,1024.14) C9.2@2103.71,1010.35
VCC_UNREG: CONN1.2 CONN2.2 CONN3.2 D1.1 R3.1 | length 2156.2
  Top Layer w15: CONN3.2@823.16,1223.9 823.16,1186.84 841.73,1168.27 ; CONN3.2@827.46,1205 ccw(c876.29,1202.83) 841.73,1168.27 ; 896.01,1168.27 ccw(c896.01,1237.42) R3.1@944.91,1188.52 ; 932.22,1168.27 ccw(c932.22,1201.21) R3.1@955.52,1177.92 ; R3.1@957.13,1168.27 841.73,1168.27
  Top Layer w18: 820,1305 v1@823.16,1301.84 ; v1(1165,1305) 1186.09,1283.91
  Top Layer w20: v1(1855,1305) 1880,1305 v1@1881.09,1303.91
  Top Layer w22: v1@797.88,1302.88 cw(c736.85,1241.85) CONN3.2@823.16,1241.85 ; CONN3.2@823.16,1223.9 v1@823.16,1301.84 ; 823.16,1269.17 cw(c870.83,1269.17) v1@837.12,1302.88 ; CONN1.2@1186.09,1223.9 1186.09,1283.91 ; CONN2.2@1881.09,1223.9 v1@1881.09,1303.91 ; 1881.09,1264.17 cw(c1935.83,1264.17) v1@1897.12,1302.88
  Bottom Layer w40: v1(800,1305) v1(835,1305) v1(1165,1305) v1(1210,1305) 1225,1305 1380,1150 1585,1150 1740,1305 v1(1855,1305) v1(1895,1305) 2055,1305 D1.1@2065,1295 ; v1@1210,1311 cw(c1210,1289.27) 1225.36,1304.64 ; 2059.77,1300.23 ccw(c2073.33,1313.8) D1.1@2073.33,1294.61
pads on no net: CONN1.0 CONN2.0 CONN3.0 CONN4.6 CONN5.0 U1.0 U1.J1-1 U1.J1-2 U1.J1-3 U1.J1-4 U1.J1-5 U1.J1-6 U1.J1-7 U1.J1-8 U1.J1-9 U1.J1-11 U1.J1-12 U1.J1-13 U1.J1-14 U1.J1-15 U1.J1-16 U1.J1-17 U1.J1-18 U1.J1-19 U1.J1-20 U1.J1-21 U1.J1-22 U1.J1-23 U1.J1-24 U1.J1-25 U1.J1-27 U1.J1-28 U1.J1-29 U1.J1-30 U1.J1-32 U1.J1-33 U1.J1-34 U1.J1-35 U1.J1-38 U1.J1-39 U1.J1-40 U1.J1-41 U1.J1-42 U1.J1-43 U1.J1-44 U1.J1-45 U1.J1-47 U1.J1-48 U1.J1-49 U1.J1-51 U1.J1-53 U1.J1-55 U1.J1-57 U1.J1-58 U1.J1-59 U1.J1-60 U1.J1-61 U1.J1-62 U1.J1-63 U1.J1-64 U1.J1-65 U1.J1-68 U1.J1-69 U1.J4-4 U1.J4-5 U1.J4-6 U1.J4-7 U1.J4-8 U1.J4-9 U1.J4-10 U1.J4-11 U1.J4-12 U1.J4-13 U1.J4-14 U1.J4-15 U1.J4-16 U1.J4-17 U1.J4-18 U1.J4-19 U1.J4-20 U1.J4-21 U1.J4-22 U1.J4-23 U1.J4-25 U1.J4-27 U1.J4-28 U1.J4-31 U1.J4-32 U1.J4-34 U1.J4-35 U1.J4-36 U1.J4-37 U1.J4-38 U1.J4-39 U1.J4-49 U1.J4-50 U1.J4-51 U1.J4-52 U1.J4-53 U1.J4-54 U1.J4-55 U1.J4-56 U1.J4-57 U1.J4-58 U1.J4-59 U1.J4-60 U1.J4-61 U1.J4-62 U1.J4-63 U1.J4-64 U1.J4-65 U1.J4-66 U1.J4-67 U1.J4-68 U1.J4-69 U1.J4-70 U2.1 U2.20 U3.1 U3.7 U3.8 U3.9 U3.12 U3.13 U3.14 U3.20
copper on no net:
  other v1: 1162,45 541,61

## Polygon pours and split planes (outlines as drawn)
GND on Top Layer "Top Layer - GND" (solid, remove dead copper, pour order 4): 108.27,0 cw(c108.27,108.27) 0,108.27 0,1309.05 cw(c108.27,1309.05) 108.27,1417.32 2175.2,1417.32 cw(c2175.2,1309.05) 2283.46,1309.05 2283.46,108.27 cw(c2175.2,108.27) 2175.2,0
GND on Bottom Layer "Bottom Layer - GND" (solid, remove dead copper, pour order 6): 108.27,0 cw(c108.27,108.27) 0,108.27 0,1309.05 cw(c108.27,1309.05) 108.27,1417.32 2175.2,1417.32 cw(c2175.2,1309.05) 2283.46,1309.05 2283.46,108.27 cw(c2175.2,108.27) 2175.2,0

## Keep-outs
Top Layer:
  circle w3.94: c1505.91,108.27 r59.06
  circle w3.94: c305.12,108.27 r59.06
  circle w3.94: c305.12,1309.06 r59.06
  circle w3.94: c1505.91,1309.06 r59.06
  circle w3.94: c1505.91,108.27 r106.3
  circle w3.94: c305.12,108.27 r106.3
  circle w3.94: c305.12,1309.05 r106.3
  circle w3.94: c1505.91,1309.05 r106.3
Bottom Layer:
  circle w3.94: c1506.06,108.27 r106.3
  circle w3.94: c305.27,108.27 r106.3
  circle w3.94: c305.27,1309.06 r106.3
  circle w3.94: c1506.06,1309.06 r106.3

## Other copper
Top Layer:
  rectangle net V3.3: 1836.92,490 1935,505.97
  rectangle net VCC_UNREG: 785,1285 850,1325
  rectangle net VCC_UNREG: 1150,1283.91 1225,1325
  rectangle net VCC_UNREG: 1840,1290 1910,1320

## Silkscreen, mask and mechanical layers (free items; w line width, h text height)
Top Overlay:
  text "Pwr" at 56,1214 h60
  text "Stat" at 183,1083 h60
  text "Mesg" at 186,299 h60
  text "Link" at 60,176 h60
Bottom Overlay:
  circle w10: c305.27,108.27 r108.27
  circle w10: c1506.06,108.27 r108.27
  circle w10: c1506.06,1309.05 r108.27
  circle w10: c305.27,1309.05 r108.27
  text "A" at 1973,176 h250
  text "www.OpenPilot.org" at 1169,30 h60
  text "B" at 1955,16 h160
Dimensions:
  lines w10: 108.27,1417.32 ccw(c108.27,1309.05) 0,1309.05 0,108.27 ccw(c108.27,108.27) 108.27,0 2175.2,0 ccw(c2175.2,108.27) 2283.46,108.27 2283.46,1309.05 ccw(c2175.2,1309.05) 2175.2,1417.32 109,1417.32
Assembly Top:
  text "Assembly Top" at 827.99,1512.66 h60
Assembly Bottom:
  text "Assembly Bottom" at 1636.99,1452.66 h60

## Dimensions
2410.36,1422.32 to 2410.36,5 on Dimensions
0.15,-62.99 to 2285,-61 on Dimensions
-92.37,108.27 to -90.4,1309.05 on Dimensions
306.67,-36.5 to 1507.46,-36.5 on Dimensions

## Text inside footprints (layer, text, board x,y; h text height)
U1: Top Overlay "OVERO (EARTH, AIR, WATER, FIRE)" at 529.83,399.67 h30